# Altium PCB ez-clip.PcbDoc
Units mil, origin at the board's own origin, x right, y up, seen from the top; angles counter-clockwise.
Board outline 644.82 x 986.67 mil, 2 copper layers (Top Layer, Bottom Layer); 3 components, 4 nets, 9 pads, 0 vias.
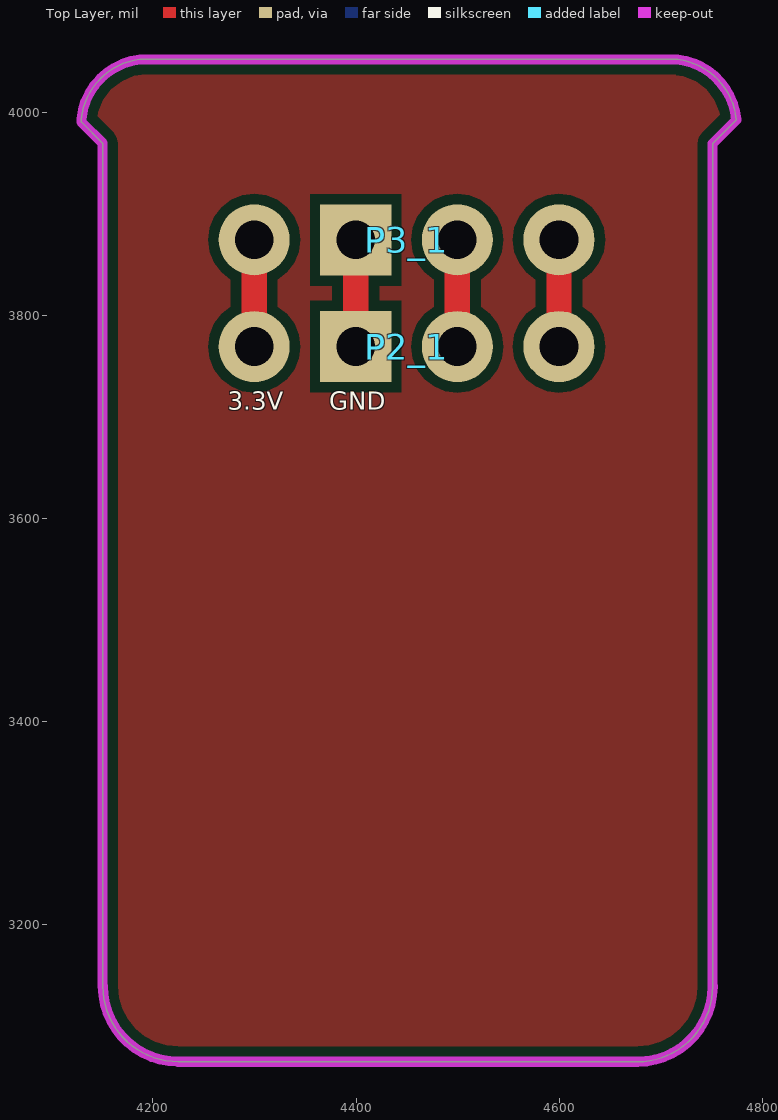
[diagram p0: Top Layer view]
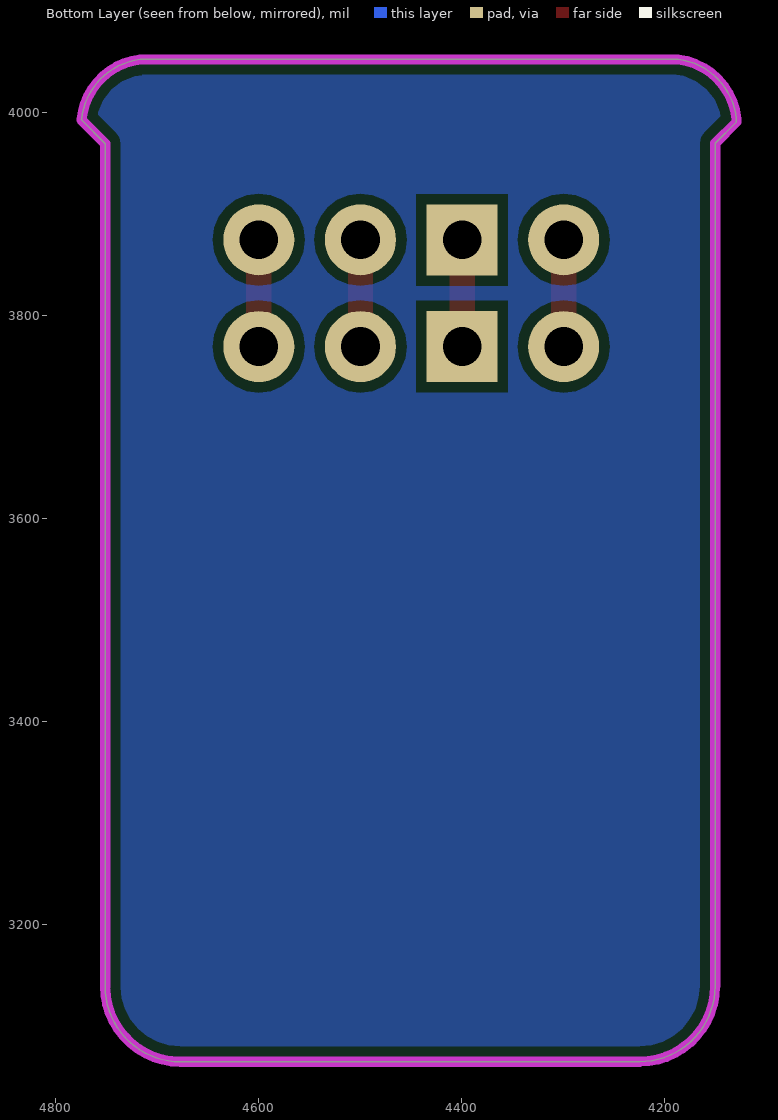
[diagram p1: Bottom Layer view, seen from below]

## Layer stack, top to bottom
Top Layer: signal copper 1.4
Dielectric: dielectric 12.6, FR-4, Dk 4.8
Bottom Layer: signal copper 1.4

## Board outline
4150.41,3139.83 4150.41,3969.38 4129.5,3990.3 4129.5,3993.42 cw(c4194.9,3986.72) 4187.12,4052 4716.3,4052 4716.3,4051.9 cw(c4708.64,3986.61) 4774.09,3992.76 4774.32,3992.54 4750.79,3969.01 4750.79,3139.64 4750.91,3139.64 cw(c4676.6,3139.64) 4676.6,3065.33 4676.6,3065.41 4224.91,3065.41 4224.91,3065.52 cw(c4224.91,3139.83)

## Design rules (kind name [scope] priority, off if disabled: settings)
Clearance [All] p1: gap=10
PolygonConnect [All] p1: connectstyle=Relief reliefconductorwidth=10 reliefentries=4 polygonreliefangle="90 Angle"
RoutingVias [All] p1: holewidth=28 width=50 viastyle="Through Hole" minholewidth=28 minwidth=50 maxholewidth=28 maxwidth=50
SilkscreenOverComponentPads [All] p1: minsilkscreentomaskgap=10
SolderMaskExpansion [All] p1: expansion=4
Width [All] p1: maxlimit=30 minlimit=10 preferedwidth=20 minimp=50.000000 maximp=50.000000 favimp=50.000000
27 further rules are at their usual default settings.

## Components (designator, comment, footprint, x,y, rotation, side; value= is the part's Value field where it differs from the comment)
P2 "Header 4" HDR1X4#1 3989,3668.5 r180 top
P2_1 "Header 4" HDR1X4#2 4599.6,3769.35 r180 top (schematic designator P2)
P3_1 "Header 4" HDR1X4#2 4599.6,3874.35 r180 top (schematic designator P2)

## Footprints (in the part's own frame and the unit in brackets; to place one, negate y for a bottom-side part, rotate by r counter-clockwise, add the part's x,y. Pads: shape width x height; smd on the part's side, far side on the other; paste and mask are expansions set on the pad)
HDR1X4#1 [mil] "Connector; Header; 4 Position"
HDR1X4#2 [mil] "Connector; Header; 4 Position"
  round 70 hole 38: 1(0,0) 2(100,0) 4(300,0)
  rect 70x70 hole 38: 3(200,0)

## Part data
P2 P2_1 P3_1: "Header, 4-Pin"

## Free pads (board coordinates)
  round 225 on Top Solder: 0(4452.6,3334.07)

## Nets (pads, with @x,y where several pads share a name; then routed paths per layer and width w, separated by ;. In a path a pad name is that pad's centre, name@x,y a point inside that pad or via, vN(x,y) a via of type N, cw(c..) or ccw(c..) an arc to the next point about the centre after c; other vN are vias at no path point)
1: P2_1.1 P3_1.1 | length 105
  Top Layer w25: P2_1.1 P3_1.1
2: P2_1.2 P3_1.2 | length 105
  Top Layer w25: P2_1.2 P3_1.2
3: P2_1.3 P3_1.3 | length 105
  Top Layer w25: P2_1.3 P3_1.3
4: P2_1.4 P3_1.4 | length 105
  Top Layer w25: P2_1.4 P3_1.4

## Polygon pours and split planes (outlines as drawn)
no net on Top Layer "Top Layer-No Net" (solid, pour order 2): 4157.2,3918.3 4159.6,3742.2 4150.6,3415.42 4155.4,3150.97 ccw(c4229.71,3150.97) 4229.71,3076.66 4448.82,3074.8 4667.92,3076.66 ccw(c4667.92,3150.97) 4742.24,3150.97 4747,3436 4742.4,3777.3 4743.6,3848.4 4742.4,3914.7 4741,3954.5 4771.27,3967.05 ccw(c4696.95,3967.05) 4696.95,4041.37 4207.25,4049.87 ccw(c4207.25,3975.55) 4132.93,3975.55 4158.4,3956.9
no net on Bottom Layer "Top Layer-No Net" (solid, pour order 5): 4156,3923.1 4157.2,3796.5 4152,3432 4161.73,3140.75 ccw(c4236.05,3140.75) 4236.05,3066.43 4428.6,3065.7 4673.25,3062.83 ccw(c4673.25,3137.15) 4747.57,3137.15 4749,3456 4737.4,3836.3 4738.6,3965.3 4770.07,3975.55 ccw(c4695.75,3975.55) 4695.75,4049.87 4213.35,4049.87 ccw(c4213.35,3975.55) 4139.03,3975.55 4159.6,3966.6

## Keep-outs
Keep-Out Layer:
  lines w10: 4150.41,3139.83 4150.41,3969.38 4129.5,3990.3 4129.5,3993.42 cw(c4194.9,3986.72) 4187.12,4052 4716.3,4052 ; 4150.6,3139.83 ccw(c4224.91,3139.83) 4224.91,3065.52 ; 4224.91,3065.41 4676.6,3065.41 ; 4676.6,3065.33 ccw(c4676.6,3139.64) 4750.91,3139.64 ; 4716.3,4051.9 cw(c4708.64,3986.61) 4774.09,3992.76 ; 4750.79,3139.64 4750.79,3969.01 4774.32,3992.54

## Silkscreen, mask and mechanical layers (free items; w line width, h text height)
Top Overlay:
  text "3.3V" at 4273.6,3701.35 h30
  text "GND" at 4373.6,3701.35 h30
Bottom Solder:
  text ":)" at 4418.6,3526.7 h150 r270